# Altium PCB mcu_board.PcbDoc
Units mm, origin at the board's own origin, x right, y up, seen from the top; angles counter-clockwise.
Board outline 259.08 x 63.5 mm, 2 copper layers (Top Layer, Bottom Layer); 74 components, 57 nets, 248 pads, 15 vias.
Unrouted connection lines stored in the file: 6.
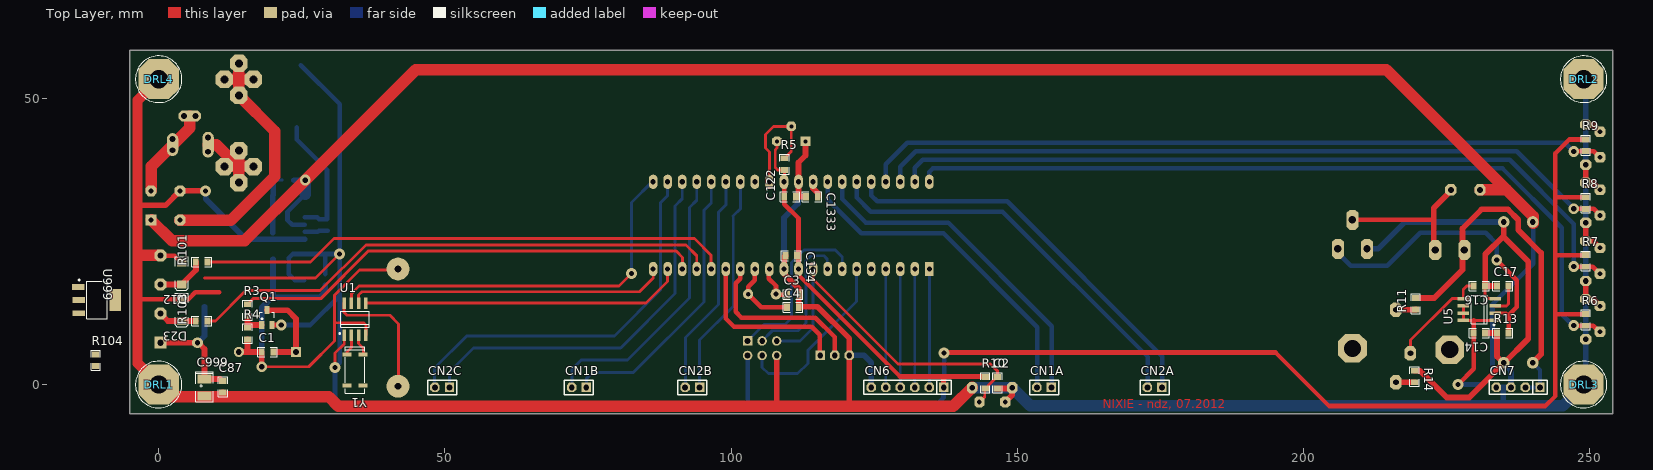
[diagram p0: Top Layer view]
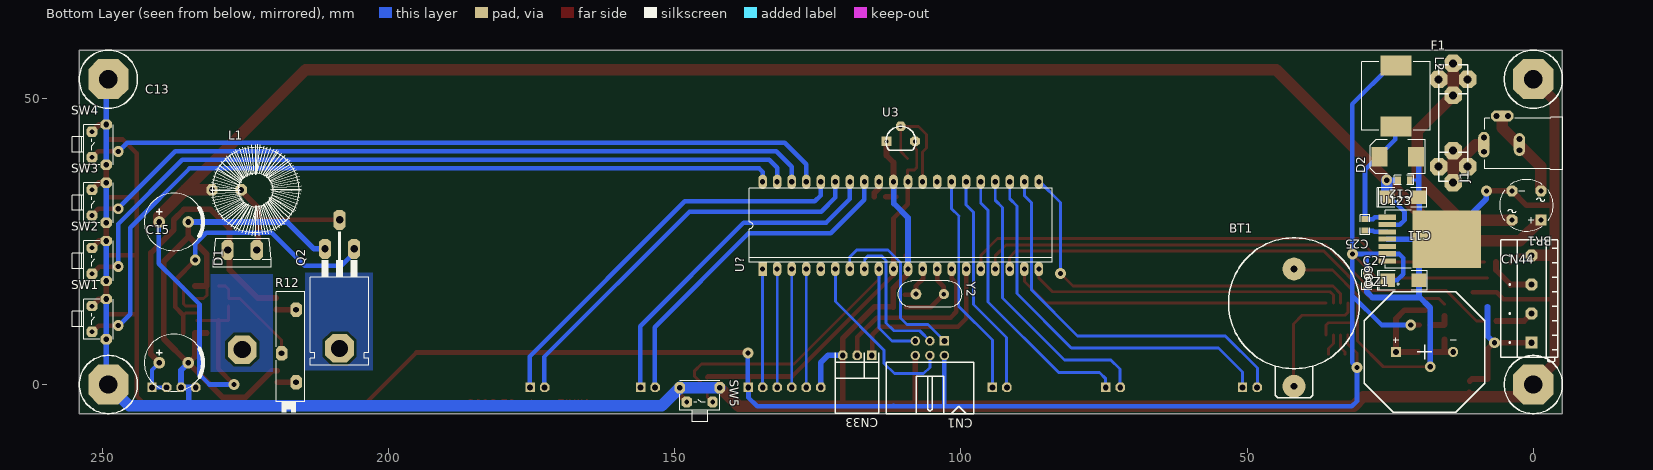
[diagram p1: Bottom Layer view, seen from below]
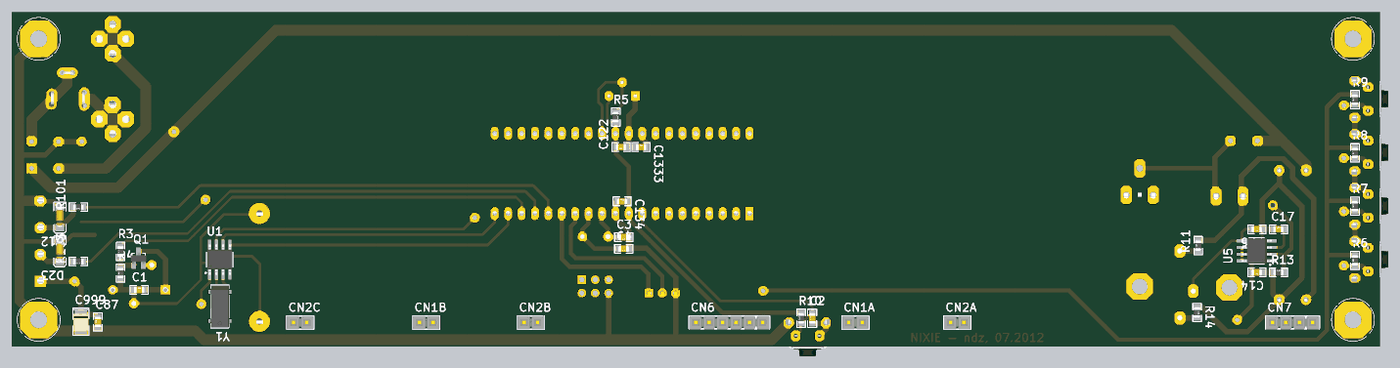
[diagram p2: 3D render of the assembled board from above, using the file's embedded part models]
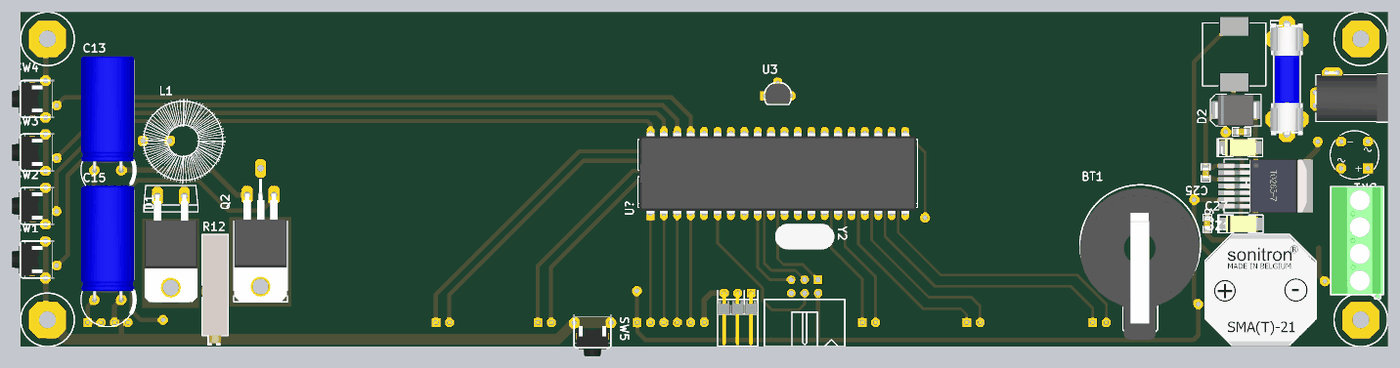
[diagram p3: 3D render of the assembled board from below, using the file's embedded part models]

## Layer stack, top to bottom
Top Solder: solder mask 0.0102, Solder Resist, Dk 3.5
Top Layer: signal copper 0.0356
Dielectric1: dielectric 0.32, FR-4, Dk 4.8
Bottom Layer: signal copper 0.0356
Bottom Solder: solder mask 0.0102, Solder Resist, Dk 3.5

## Board outline
-5.08,58.42 -5.08,-5.08 254,-5.08 254,58.42

## Design rules (kind name [scope] priority, off if disabled: settings)
Clearance [All] p1: gap=0.45 ignorepadtopadclearanceinfootprint=FALSE except(0: Arc-Hole Track-Hole SMDPad-Hole THPad-Hole Via-Hole Fill-Hole Poly-Hole Region-Hole Text-Hole)
FabricationTestPointUsage TestPointUsage [All] p1: valid=0 allowmultiple=FALSE
FabricationTestpoint Testpoint [All] p1: side=3 testpointundercomponent=TRUE minsize=1.016 maxsize=2.54 preferedsize=1.524 minholesize=0 maxholesize=1.016 preferedholesize=0.813 testpointgrid=0.025 allowsidetop=TRUE allowsidebottom=TRUE usegrid=TRUE gridtolerance=0
PolygonConnect [All] p1: connectstyle=Relief reliefconductorwidth=0.254 reliefentries=4 polygonreliefangle="90 Angle" airgapwidth=0.254
RoomDefinition mcu [InComponentClass('mcu')] p1: confinementstyle=ConfineIn formatcopy=TRUE lockcomponents=FALSE outline -11.43,-10.16 260.35,-10.16 260.35,62.23 -11.43,62.23
RoomDefinition power [InComponentClass('power')] p2: confinementstyle=ConfineIn formatcopy=TRUE lockcomponents=FALSE outline -11.43,-10.16 260.35,-10.16 260.35,62.23 -11.43,62.23
RoutingVias [All] p1: holewidth=0.9 width=1.9 viastyle="Through Hole" minholewidth=0.711 minwidth=1.27 maxholewidth=1 maxwidth=2
SilkToSolderMaskClearance SilkscreenOverComponentPads [IsPad] p1: minsilkscreentomaskgap=0.254 clearancetoexposedcopper=TRUE
SolderMaskExpansion [All] p1: expansion=0.102
Width [All] p1: maxlimit=2.54 minlimit=0.5 preferedwidth=0.762 toplayer_prefwidth=0.508 minimp=50.000000 maximp=50.000000 favimp=50.000000
27 further rules are at their usual default settings.

## Classes and differential pairs
component class mcu: BT1 BZ1 C1 C2 C3 C4 C122 C134 C1333 CN1 CN1A CN1B CN2 CN2A CN2B CN2C CN5 CN6 CN7 CN33 CN44 D12 D23 LS1 Q1 R3 R4 R5 R6 R7 R8 R9 R10 R101 R103 R104 SW1 SW2 SW3 SW4 SW5 U1 U2 U3 U? Y1 Y2
component class power: BR1 C11 C12 C13 C14 C15 C16 C17 C25 C27 C87 C99 C999 D1 D2 DRL1 DRL2 DRL3 DRL4 F1 J1 L1 L2 Q2 R11 R12 R13 R14 U5 U123 U999

## Components (designator, comment, footprint, x,y, rotation, side; value= is the part's Value field where it differs from the comment)
BR1 "W005M" WxxM 1.2,31.3 r0 bottom
BT1 "CR2032 Battery" SN2032 41.8,14.2 r90 bottom
BZ1 "SMA-21" "SMA-21 P10" 19,5.7 r180 bottom
C1 "1nF" C0805 19.016,5.7 r0 top
C2 "100nF" C0805 146.5,0.3 r90 top
C3 "22pF" C0805 110.8,15.7 r180 top
C4 "22pF" C0805 110.8,13.5 r180 top
C11 "470uF/25V" SMDC 22.8,32.7 r0 bottom
C12 "1uF / 50V" C0805 22.6,35.7 r0 bottom
C13 "1000 uF / 25V" CE10x20-5_RA 237.5,28.4 r180 bottom
C14 "100nF" C0805 230.7,9 r180 top
C15 "47uF uF / 400V" CE10x20-5_RA 237.49,3.81 r180 bottom
C16 "100nF" C0805 230.7,17.2 r180 top
C17 "1nF" C0805 234.8,17.2 r0 top
C25 "10nF" C0805 29.4,27.9 r270 bottom
C27 "1uF / 50V" C0805 29.1,18.3 r90 bottom
C87 "100nF" C0805 11.2,-0.4 r90 top
C99 "330uF/15V" SMDC 22.7,18.2 r0 bottom
C122 "1nF" C0805 110.3,32.8 r180 top
C134 "1nF" C0805 110.5,22.5 r0 top
C999 "10uF" SMDB 8,-0.5 r90 top
C1333 "1nF" C0805 114.1,32.8 r0 top
CN1 "AVR ISP Interface" IDC6_RA 102.87,7.62 r0 bottom
CN1A "CN_2x1" GP_2x1 155.956,-0.508 r180 top locked
CN1B "CN_2x1" GP_2x1 74.676,-0.508 r180 top locked
CN2A "CN_2x1" GP_2x1 175.26,-0.508 r180 top locked
CN2B "CN_2x1" GP_2x1 94.488,-0.508 r180 top locked
CN2C "CN_2x1" GP_2x1 50.8,-0.508 r180 top locked
CN6 "CN_6x1" GP_6x1 137.16,-0.508 r180 top locked
CN7 "CN_4x1" GP_4x1 241.3,-0.508 r180 top locked
CN33 "CN_3x1" GP_3x1H 115.57,5.08 r0 bottom
CN44 "MKDS 1,5/4-5,08" "MKDS 1,5/4-5,08" 0.3,12.4 r90 bottom
D1 "BYV29" TO-220-2_RA 223,23.5 r0 bottom
D2 "SK54C" SMC 23.7,39.8 r0 bottom
D12 "2V7 0,5W" MiniMELF 4,19.405 r270 top
D23 "2V7 0,5W" MiniMELF 4,13.005 r270 top
DRL1 "SCREW DRILL" "3mm screw drill I" 0,0 r0 top locked
DRL2 "SCREW DRILL" "3mm screw drill I" 248.92,53.34 r0 top locked
DRL3 "SCREW DRILL" "3mm screw drill I" 248.92,0 r0 top locked
DRL4 "SCREW DRILL" "3mm screw drill I" 0,53.34 r0 top locked
F1 "5x20 Fuse Socket" "Bezp 5x20 uniw II" 14,45.7 r90 bottom
J1 "PWR2.5" KLD-0202 -5.08,41.91 r0 bottom
L1 "330uH / 3A" IND_15_POZIOMO 223.2,34 r180 bottom
L2 "22uH" DE1207 24,50.4 r270 bottom
Q1 "BC857" SOT-23 18.9,11.7 r0 top
Q2 "IRF840" TO-220AB_RA_H1 206,23.7 r0 bottom
R3 "1k" R0805 15.5,13 r90 top
R4 "100k" R0805 15.5,8.9 r90 top
R5 "4k7" R0805 109.3,38.5 r270 top
R6 "10k" R0805 249.3,11.3 r90 top
R7 "10k" R0805 249.3,21.6 r90 top
R8 "10k" R0805 249.3,31.7 r90 top
R9 "10k" R0805 249.3,41.8 r90 top
R10 "10k" R0805 144.4,0.3 r90 top
R11 "680k" R0805 219.6,14.1 r90 top
R12 "2k2" RPOT_WIELOOB_19MM_LEZACY 217.4,6.6 r180 bottom
R13 "330" R0805 234.8,9 r0 top
R14 "4k7" R0805 219.4,1.4 r270 top
R101 "10k" R0805 7.5,21.4 r180 top
R103 "10k" R0805 7.5,11.1 r180 top
R104 "22k" R0805 -11,4.25 r90 top
SW1 "SW-TACT-SIDE" TACT_SO_THT 250.536,11.43 r0 bottom
SW2 "SW-TACT-SIDE" TACT_SO_THT 250.536,21.59 r0 bottom
SW3 "SW-TACT-SIDE" TACT_SO_THT 250.536,31.75 r0 bottom
SW4 "SW-TACT-SIDE" TACT_SO_THT 250.536,41.91 r0 bottom
SW5 "SW-TACT-SIDE" TACT_SO_THT 145.6,-1.8 r270 bottom
U1 "DS1302Z" SO8 34.29,11.43 r0 top
U3 "DS18B20+" TO-92D 110.5,42.5 r180 bottom
U5 "MC34063A" SO8 230.7,13.1 r90 top
U123 "LM2676S-3.3" "TO-263-7 (D2PAK-7)" 20.3,25.4 r270 bottom
U999 "APE1117K-HF-3" SOT-223 -14,17.05 r270 top
U? "ATmega16-16PC" DIP40 110.5,27.8 r90 bottom
Y1 "32,768kHz" 85SMX 34.29,2.54 r270 top
Y2 "16MHz" HC49-S 105.4,15.8 r180 bottom

## Footprints (in the part's own frame and the unit in brackets; to place one, negate y for a bottom-side part, rotate by r counter-clockwise, add the part's x,y. Pads: shape width x height; smd on the part's side, far side on the other; paste and mask are expansions set on the pad)
"3mm screw drill I" [mm]
  oct 7x7 hole 3.2: 0(0,0)
  silkscreen extent -4.06,-4.06 4.06,4.06
85SMX [mm] "85SMX, 5.5mm lead spacing (IQD Frequency Products)"
  rect 0.7x1.6 smd: 0(2.75,1.4) 0(2.75,-1.4) 2(-2.75,1.4)
  rect 0.7x1.6 smd paste+0: 1(-2.75,-1.4)
  silkscreen extent -4.1,-1.7 4.1,1.7, body extent -4,-1.9 4,1.9, height 2.53
"Bezp 5x20 uniw II" [mil]
  oct 120x120 hole 55.12: 1(-410,0) 1(-300,-100) 1(-300,100) 1(-190,0) 2(190,0) 2(300,-100) 2(300,100) 2(410,0)
  silkscreen extent -400,-100 400,100, body extent -420,-122 418,122, height 111
C0805 [mil]
  rect 40x50 smd: 1(-40,0) 2(40,0)
  silkscreen extent -68,-33 68,33, body extent -39,-25 39,25, height 31
CE10x20-5_RA [mil] "Aluminium Electrolytic Capacitor -  Radius: 10mm, Height: 20mm, PinSpacing: 5mm, Right Angle"
  round 80 hole 39.37: 1(-100,0) 2(100,0)
  silkscreen extent -200,-201 202,201, body extent -198,-15 198,853, height 395
DE1207 [mm] "FERROCORE DE1207 (12x12mm)"
  rect 3.5x5.4 smd: 1(5.3,0) 2(-5.3,0)
  silkscreen extent -6,-6 6,6, body extent -6,-6 6,6, height 8
DIP40 [mm]
  rect 2.5x1.5 hole 0.9: 1(-7.62,24.13)
  oval 2.5x1.5 hole 0.9: 2(-7.62,21.59) 3(-7.62,19.05) 4(-7.62,16.51) 5(-7.62,13.97) 6(-7.62,11.43) 7(-7.62,8.89) 8(-7.62,6.35) 9(-7.62,3.81) 10(-7.62,1.27) 11(-7.62,-1.27) 12(-7.62,-3.81) 13(-7.62,-6.35) 14(-7.62,-8.89) 15(-7.62,-11.43) 16(-7.62,-13.97) 17(-7.62,-16.51) 18(-7.62,-19.05) 19(-7.62,-21.59) 20(-7.62,-24.13) 21(7.62,-24.13) 22(7.62,-21.59) 23(7.62,-19.05) 24(7.62,-16.51) 25(7.62,-13.97) 26(7.62,-11.43) 27(7.62,-8.89) 28(7.62,-6.35) 29(7.62,-3.81) 30(7.62,-1.27) 31(7.62,1.27) 32(7.62,3.81) 33(7.62,6.35) 34(7.62,8.89) 35(7.62,11.43) 36(7.62,13.97) 37(7.62,16.51) 38(7.62,19.05) 39(7.62,21.59) 40(7.62,24.13)
  silkscreen extent -6.45,-26.5 6.45,26.5, body extent -7.74,-26.23 7.75,26.22, height 5.9
GP_2x1 [mil]
  rect 65x65 hole 39.37: 1(0,0)
  oct 65x65 hole 39.37: 2(100,0)
  silkscreen extent -50,-50 150,50, body extent -50,-50 150,50, height 330
GP_3x1H [mil]
  rect 65x65 hole 39.37: 1(0,0)
  oct 65x65 hole 39.37: 2(100,0) 3(200,0)
  silkscreen extent -50,-20 250,398, body extent -49,-13 251,390, height 120
GP_4x1 [mil]
  rect 65x65 hole 39.37: 1(0,0)
  oct 65x65 hole 39.37: 2(100,0) 3(200,0) 4(300,0)
  silkscreen extent -50,-50 350,47, body extent -50,-50 350,50, height 330
GP_6x1 [mil]
  rect 65x65 hole 39.37: 1(0,0)
  oct 65x65 hole 39.37: 2(100,0) 3(200,0) 4(300,0) 5(400,0) 6(500,0)
  silkscreen extent -50,-50 550,47, body extent -50,-50 550,50, height 330
HC49-S [mm] "Crystal Oscillator"
  round 1.9 hole 0.9: 1(-2.44,0)
  round 1.8 hole 0.8: 2(2.44,0)
  silkscreen extent -5.53,-2.32 5.53,2.32, body extent -5.62,-2.35 5.55,2.33, height 1.57
IDC6_RA [mil] "2.54mm, 6 Pin IDC Male Connector"
  rect 65x65 hole 39.37: 1(0,0)
  round 65 hole 39.37: 2(0,100) 3(100,0) 4(100,100) 5(200,0) 6(200,100)
  silkscreen extent -200,147 400,500
IND_15_POZIOMO [mm]
  oct 2x2 hole 1: 1(-7.62,0) 2(-2.54,0)
  silkscreen extent -8,-8.13 8,8
KLD-0202 [mm] "DC Power Jack, 2.5mm, KLD Series, PCB Mount"
  oval 2x4.5 all layers, no hole: 1(13.7,0)
  round 1.5 hole 1: 1A(13.7,-1.25) 1B(13.7,1.25) 2A(7.5,-1) 2B(7.5,1) 3A(9.5,-5) 3B(11.5,-5)
  oval 2x4 all layers, no hole: 2(7.5,0)
  oval 4x2 all layers, no hole: 3(10.5,-5)
  silkscreen extent -0.1,-4.8 13.6,4.4, body extent -0.03,-5.2 13.8,4.3, height 11
MiniMELF [mil]
  rect 55x65 smd: 1(-75,0) 2(75,0)
  silkscreen extent -115,-45 115,45, body extent -69,-28 69,28, height 55
"MKDS 1,5/4-5,08" [mm]
  rect 2.1x2.1 hole 1.1: 1(-5.08,0)
  oct 2.1x2.1 hole 1.1: 2(0,0) 3(5.08,0) 4(10.16,0)
  silkscreen extent -8.44,-4.6 12.88,5.4, body extent -8.23,-4.52 12.83,5.28, height 14.2
R0805 [mil]
  rect 40x50 smd: 1(-40,0) 2(40,0)
  silkscreen extent -68,-32 68,32, body extent -39,-25 39,25, height 31
RPOT_WIELOOB_19MM_LEZACY [mm]
  oct 2x2.54 hole 1: 1(1.27,-6.223) 2(1.27,6.477) 3(-1.27,-1.143)
  silkscreen extent -2.24,-11.51 2.77,9.6, body extent -2.16,-11.05 2.67,9.52, height 6.43
"SMA-21 P10" [mm]
  rect 1.778x1.778 hole 1: 1(-5,0)
  round 1.778 hole 1: 2(5,0)
  silkscreen extent -10.54,-10.54 10.54,10.54, body extent -10.5,-10.54 10.5,10.46, height 9.41
SMC [mm]
  rect 2.8x3.4 smd: 1(-3.175,0) 2(3.175,0)
  silkscreen extent -4.8,-3 4.8,3, body extent -3.98,-2.95 3.97,2.95, height 2.3
SMDB [mm] "SMDB"
  rect 1.6x2.4 smd: 1(1.476,0) 2(-1.475,0)
  silkscreen extent -2.46,-1.5 2.72,1.5, body extent -1.75,-1.4 1.75,1.4, height 1.91
SMDC [mm] "SMDC"
  rect 2.6x2.4 smd: 1(2.726,0) 2(-2.725,0)
  silkscreen extent -4.19,-1.7 4.44,1.7, body extent -3,-1.6 3,1.6, height 2.51
SN2032 [mm]
  round 4 hole 1.2: 1(-14.5,0) 2(6,0)
  silkscreen extent -16.54,-11.43 11.43,11.43, body extent -17.92,-11.27 10.78,11.48, height 7.05
SO8 [mm] "Small Outline; 8 Leads; Body Width 3.7 mm; Pitch 1.27 mm"
  rect 0.6x2 smd: 1(-1.905,-2.794) 2(-0.635,-2.794) 3(0.635,-2.794) 4(1.905,-2.794) 5(1.905,2.794) 6(0.635,2.794) 7(-0.635,2.794) 8(-1.905,2.794)
  silkscreen extent -2.79,-2.66 2.5,1.4, body extent -2.4,-2.9 2.4,2.9, height 1.75
SOT-23 [mm]
  rect 0.9x1.4 smd: 1(-0.9,-1.3) 2(0.9,-1.3) 3(0,1.3)
  silkscreen extent -1.25,-0.33 1.25,0.94, body extent -1.46,-1.31 1.46,1.16
SOT-223 [mm]
  rect 1x2.2 smd: 1(0,-0.027) 2(2.3,0) 3(4.6,0)
  rect 3.8x2 smd: 4(2.3,6.4)
  silkscreen extent -1.32,-0.02 5.6,5, body extent -0.96,-0.32 5.54,6.61, height 1.64
TACT_SO_THT [mm]
  oct 2x1.8 hole 0.8: 1(1.25,2.225) 2(1.25,-2.275)
  oct 2x1.8 hole 1: 3(-1.25,3.5) 4(-1.25,-3.5)
  silkscreen extent -2.44,-3.51 4.72,3.48, body extent -2.89,-4.21 5.08,4.15, height 7.37
TO-92D [mm]
  rect 1.7x1.7 hole 0.7: 1(-2.5,0)
  oct 1.7x1.7 hole 0.7: 2(0,2.6) 3(2.5,0)
  silkscreen extent -2.58,-1.61 2.62,2.6, body extent -2.77,-1.53 2.81,2.81, height 8
TO-220-2_RA [mm]
  oct 5x5 hole 3: 0(2.54,17.39)
  oct 2.1x3.5 hole 1.3: 1(0,0) 2(5.08,0)
  silkscreen extent -2.56,-2 7.64,3, body extent -2.46,-0.42 7.54,20.18, height 4.5
TO-220AB_RA_H1 [mm]
  oct 5x5 hole 3: 0(2.54,17.39)
  oct 2.1x3.5 hole 1.3: 1(0,0) 2(2.54,-5.08) 3(5.08,0)
  silkscreen extent -2.56,-3.05 7.64,20.29, body extent -2.46,-0.41 7.54,20.19, height 4.5
"TO-263-7 (D2PAK-7)" [mm]
  rect 0.91x3 smd: 1(-3.81,-5.207) 2(-2.54,-5.207) 3(-1.27,-5.207) 4(0,-5.207) 5(1.27,-5.207) 6(2.54,-5.207) 7(3.81,-5.207)
  rect 10x12 smd: 8(0,5.207)
  silkscreen extent -5.08,-5.59 5.08,-1.02, body extent -5,-5.62 5,10.05, height 4.78
WxxM [mm] "W005M - W10M, (50-1000V, 1,5A) Bridge Rectifiers, DC Components"
  rect 1.9x1.9 hole 0.9: 1(-2.54,2.54)
  oct 1.9x1.9 hole 0.9: 2(2.54,2.54) 3(-2.54,-2.54) 4(2.54,-2.54)
  silkscreen extent -4.6,-4.6 4.6,4.6, body extent -4.53,-4.58 4.54,4.5, height 5.5

## Part data
BR1: "50V, 1,5A, Single Phase Silicone Bridge Rectifier, DC Components", DatasheetVersion=E2732B, LatestRevisionDate=29-May-2009, LatestRevisionNote="Sch pins A & K swapped.", PackageDescription="Bridge Rectifier; 4 Terminals; Body 9.4 x 9.4 mm (typ); Pitch 5.08 mm", PackageReference=D-38, Published=8-Jun-2000, Publisher="Altium Limited"
BZ1: library part SMA21, "Sonitron 21mm Piezo Buzzer"
C1 C2 C3 C4 C12 C14 C16 C17 C25 C27 C87 C122 C134 C1333: library part Cap, "Capacitor", ComponentLink1Description=datasheet, ComponentLink2Description=supplier
C11 C99 C999: library part "Cap Pol Tant", "Polarized Tantalum Capacitor", ComponentLink1Description=datasheet, ComponentLink2Description=supplier
C13 C15: library part "Cap Pol", "Polarized Capacitor", ComponentLink1Description=datasheet, ComponentLink2Description=supplier
CN1: "ISP Programming Header for AVR MCU's"
D1: "Rectifier diodes ultrafast", Published=07-May-2007
D2: "Schottky Diode: 40V, 5A", PackageReference=SOT-23, Published=08-Mar-2006
D12 D23: library part BZV55C2V7, "Zener Diode 2V7, 0,5W"
DRL1 DRL2 DRL3 DRL4: "Screw Drill"
F1: library part "Fuse Socket", LatestRevisionDate=17-Jul-2002, LatestRevisionNote="Re-released for DXP Platform.", PackageDescription="Thru-Hole; 2 Leads", PackageReference=PIN-W2/E2.8, Published=8-Jun-2000, Publisher="Altium Limited"
J1: "Low Voltage Power Supply Connector", ComponentLink1Description="Manufacturer Link", ComponentLink1URL=http://domino.kycon.com/internet/Products.html, DatasheetDocument=09-May-2002, Published=17-Dec-2003, Publisher="Altium Limited"
L1: library part InducCore, "Magnetic-Core Inductor with Winding Polarity Marking", Published=08-Mar-2006
L2: library part Ind, "Inductor", ComponentLink1Description=datasheet, ComponentLink2Description=supplier, Published=08-Mar-2006
Q1: "PNP General Purpose Transistor (VCE=-45V, IC=-100mA)"
Q2: "N-Channel Power MOSFET", Package Reference=TO-220, Published=22-Jan-2007
R3 R4 R5 R6 R7 R8 R9 R10 R11 R13 R14 R101 R103 R104: library part Res, "Resistor", ComponentLink1Description=datasheet, ComponentLink2Description=supplier, Published=19-Feb-2006
R12: library part RPot, "Potentiometer", Published=03-Apr-2006
SW1 SW2 SW3 SW4 SW5: "Side-operated Tactile Switch", Published=30-Jun-2006
U1: "Trickle-Charge Timekeeping Chip"
U3: "DS18B20+ (TO92) 1-Wire Digital Thermometer"
U5: "1.5 A, Step-Up/Down/Inverting Switching Regulator", PackageReference=SO8, Published=22-Nov-2006
U123: "High Efficiency 3A Step-Down Simple Switcher 3.3V Regulator in TO-263 (D2PAK)"
U999: "800mA Low-Dropout Adjustable, 1A Linear Regulator, SOT223 Package", ComponentLink1Description="Manufacturer Link", ComponentLink1URL=http://www.st.com/, ComponentLink2Description=Datasheet, ComponentLink2URL=http://www.st.com/stonline/books/pdf/docs/2574.pdf, DatasheetVersion=Feb-2004, LatestRevisionDate=06-Jun-2005, LatestRevisionNote="PCB Pin sequence re-ordered.", PackageDescription="TO, Thru-Hole, Vertical, Heatsink Mounted; 3 In-Line Leads; Pitch 2.54 mm", PackageReference=TO-220A, PackageVersion=Jul-2004, Published=24-Aug-2001, Publisher="Altium Limited", Supplier 1=TME, Supplier Part Number 1=APE1117K-HF-3
U?: "8-Bit AVR Microcontroller with 16K Bytes of In-System Programmable Flash Memory", Package Information="Latest Revision: Dec-1999", Package Reference=40P6, Datasheet="Latest Revision: 2466E-AVR-10/02", Published=17-Sep-2003, Publisher="Altium Limited"
Y1: library part "Clock XTAL", "Crystal Clock Oscillator", ComponentLink1Description=datasheet, ComponentLink2Description=supplier
Y2: library part XTAL, "Crystal Oscillator", ComponentLink1Description=datasheet, ComponentLink2Description=supplier
BT1: Published=24-Mar-1999, Publisher="Altium Limited", Revision="July-2002: Re-released for DXP Platform."

## Via types
v1: diameter 1.9, hole 0.9, Top Layer to Bottom Layer, 15 vias

## Nets (pads, with @x,y where several pads share a name; then routed paths per layer and width w, separated by ;. In a path a pad name is that pad's centre, name@x,y a point inside that pad or via, vN(x,y) a via of type N, cw(c..) or ccw(c..) an arc to the next point about the centre after c; other vN are vias at no path point)
1WIRE: R5.1 U3.2 U?.29 | length 20.2
  Top Layer w0.5: U?.29@106.7,35.4 106.7,40.6 106,41.3 106,43.7 107.4,45.1 U3.2@110.6,45.1 ; R5.1 110.5,40.716 U3.2@110.5,45.4
ANODE_H1: CN2C.1 U?.23 | length 67.7
  Bottom Layer w0.5: CN2C.1@50.8,-0.4 50.8,2.2 55,6.4 80.7,6.4 90.196,15.896 90.196,31.196 91.45,32.45 U?.23
ANODE_H10: CN2C.2 U?.22 | length 67.9
  Bottom Layer w0.5: CN2C.2@48.2,-0.5 48.2,2.9 53.8,8.5 79.6,8.5 87.656,16.556 87.656,31.756 88.91,33.01 U?.22
  Bottom Layer w1: CN2C.2 CN2C.2@48.26,-0.5
ANODE_M1: CN2B.1 U?.27 | length 39
  Bottom Layer w0.5: CN2B.1@94.5,-0.6 94.5,7.8 100.356,13.656 100.356,29.444 100.35,29.45 101.61,30.71 U?.27
ANODE_M10: CN2B.2 U?.26 | length 38.8
  Bottom Layer w0.5: CN2B.2@92,-0.5 92,8.2 97.8,14 97.8,30.1 99.07,31.37 U?.26
ANODE_S1: CN2A.1 U?.36 | length 70.3
  Bottom Layer w0.8: U?.36 124.47,33.03 125.5,32 148.2,32 175.3,4.9 CN2A.1@175.3,-0.5
ANODE_S10: CN2A.2 U?.35 | length 70.4
  Bottom Layer w0.762: U?.35 121.93,32.67 124.4,30.2 147.4,30.2 172.8,4.8 CN2A.2@172.8,-0.4
BUZZER: R3.2 U?.18 | length 82.3
  Top Layer w0.5: R3.2 16.484,15 28.3,15 36.6,23.3 90.4,23.3 91.5,22.2 U?.18@91.5,20.2
DIG_A: CN6.2 U?.1 | length 20.5
  Bottom Layer w0.5: CN6.2@134.63,-0.37 U?.1
DIG_B: CN6.3 U?.2 | length 20.7
  Bottom Layer w0.5: CN6.3 U?.2@132.08,20.18
DIG_C: CN6.4 U?.3 | length 20.6
  Bottom Layer w0.5: CN6.4@129.55,-0.45 U?.3
DIG_D: CN6.5 U?.4 | length 20.7
  Bottom Layer w0.5: CN6.5 U?.4@127,20.2
GND: BR1.4 BT1.2 BZ1.2 C1.1 C2.1 C3.1 C4.1 C11.2 C12.1 C13.2 C14.1 C15.2 C16.1 C17.1 C27.1 C87.1 C99.2 C122.1 C134.1 C999.2 C1333.1 CN1.6 CN6.6 CN7.3 CN7.4 CN33.3 CN44.4 D2.1 D12.1 D23.1 DRL1.0 DRL2.0 DRL3.0 DRL4.0 Q2.3 R4.1 R13.1 R14.1 SW1.2 SW1.3 SW1.4 SW2.2 SW2.3 SW2.4 SW3.2 SW3.3 SW3.4 SW4.2 SW4.3 SW4.4 SW5.2 SW5.3 SW5.4 U1.4 U3.1 U5.4 U123.4 U123.8 U999.1 U?.11 U?.31 | length 726.7
  Top Layer w0.5: v1(18,3.1) 26.2,3.1 30.7,7.6 30.7,15.6 35.1,20 BT1.2@41.9,20 ; 30.8,10.8 35.8,10.8 36.195,10.405 U1.4 ; C16.1@231.7,17.3 231.7,15.6 232.295,15.005 U5.4
  Top Layer w0.8: -3.8,14.9 -3.7,14.9 5.2,14.9 6.4,16.1 10.6,16.1 ; CN44.4@0.2,22.5 2.81,22.5 D12.1
  Top Layer w1: -3.7,31.3 1.2,31.3 BR1.4 v1(8.16,33.84) ; C999.2 10.625,-1.975 C87.1@11.2,-1.4 ; BZ1.2 15.4,5.7 ; R4.1 15.5,5.8 15.4,5.7 ; C1.1@17.9,5.7 15.4,5.7 ; v1(18,3.1) C1.1 ; 107.95,-3.55 CN1.6 ; U?.11 109.23,19.37 111.8,16.8 C4.1@111.8,13.5 ; U?.11@109.3,20.2 109.3,22.316 C134.1 ; C122.1@111.4,32.8 C1333.1 ; C122.1@111.77,32.93 U?.31 ; U?.31@111.77,35.43 111.77,38.77 113,40 U3.1 ; C4.1@111.9,13.6 115.1,13.6 120.65,8.05 CN33.3 120.65,-3.75 ; C2.1@146.4,-0.7 148.95,-0.7 SW5.4 149.1,-1.825 SW5.2 ; R14.1 220.334,2.416 225,-2.25 228.95,-2.25 C15.2@234.95,3.75 ; C14.1 R13.1 233.8,9 233.8,4.9 C15.2@234.95,3.75 ; C16.1 231.75,17.234 231.75,22.75 234.96,25.96 C13.2@234.96,28.36 ; C16.1@231.916,17.2 C17.1 C17.1@233.8,17.2 ; 234.96,25.79 239.25,21.5 239.25,8 C15.2@235,3.75 ; C13.2 C13.2@234.96,28.36 ; C15.2@235,3.8 C15.2@234.95,3.75 ; C13.2@235,28.4 C13.2@234.96,28.36 ; SW2.4 SW3.3 249.286,28.286 SW3.3@249.3,28.3 ; SW3.4 249.286,38.386 SW4.3@249.3,38.4 ; SW2.3@249.3,18 249.3,14.9 250.591,14.9 SW1.2 ; SW2.4@249.3,25.1 250.551,25.1 SW2.2 ; SW3.4@249.3,35.2 250.611,35.2 SW3.2 ; SW4.4@249.3,45.4 250.571,45.4 SW4.2
  Top Layer w1.8: DRL1.0 -3.7,3.7 -3.7,14.9 -3.7,31.3 -3.7,49.64 DRL4.0
  Top Layer w2: -3.6,22.6 CN44.4@0.3,22.6 ; DRL1.0 2.1,-2.1 29.7,-2.1 31.384,-3.784 138.816,-3.784 SW5.3@142.1,-0.5
  Bottom Layer w0.5: 20,35.8 20.1,35.7 C12.1
  Bottom Layer w1: v1@8.2,33.8 8.2,32.4 15.2,25.4 U123.4 U123.4@25.527,25.4 ; v1(18,3.1) 18,13.4 19.975,15.375 C99.2 19.975,21.875 U123.8@20,21.9 ; 19.9,15.2 28.1,15.2 29.1,16.2 C27.1 C27.1@29.1,17.3 ; U123.8@19.9,26.5 19.9,33.025 C11.2@20,33.125 ; C11.2@20,33.1 C11.2@20,33.125 ; D2.1 20,39.275 20,35.8 C11.2@20,33.125 ; U?.11 109.23,29.13 111.7,31.6 U?.31@111.7,35.5 ; CN33.3@120.6,5.1 123.2,5.1 124.46,3.84 CN6.6 ; Q2.3 213,23.7 217.7,28.4 C13.2 C13.2@235,28.4 ; CN7.4 234.9,-0.508 ; C15.2 236.25,2.51 CN7.3@236.25,-0.5 ; 235,-3.7 234.9,-3.6 234.9,-0.508 ; CN7.3@236.2,-0.5 236.192,-0.508 234.9,-0.508 ; DRL2.0@248.7,53.3 249.286,52.714 SW4.4 249.286,38.414 SW4.3@249.3,38.4 ; SW2.3@249.2,18.1 249.286,18.186 SW2.4 ; DRL3.0@249.286,0.486 SW1.3 ; SW1.4 249.286,8.014 SW1.3@249.3,8 ; SW3.4 249.286,28.314 SW3.3@249.3,28.3
  Bottom Layer w2: SW5.3 149.05,-0.55 SW5.4@149.1,-0.5 ; SW5.4 152.25,-3.7 235,-3.7 245.3,-3.7 DRL3.0@249,0
MISO: CN1.1 U?.7 | length 31.4
  Bottom Layer w0.5: CN1.1 105.75,10.5 109.4,10.5 110.516,11.616 110.516,21.316 112.7,23.5 118.2,23.5 119.4,22.3 119.4,20.3 U?.7@119.3,20.2
MOSI: CN1.4 U?.6 | length 31.3
  Bottom Layer w0.5: CN1.4 105.41,2.99 106.5,1.9 111.6,1.9 113.4,3.7 113.4,6 121.9,14.5 U?.6@121.9,20.2
NEON1A: CN1A.1 U?.34 | length 59.6
  Bottom Layer w0.8: U?.34 119.39,32.41 123.5,28.3 137.9,28.3 156,10.2 CN1A.1@156,-0.6
NEON1B: CN1B.1 U?.25 | length 49.1
  Bottom Layer w0.5: CN1B.1@74.7,-0.5 74.7,1 75.8,2.1 82.9,2.1 95.244,14.444 95.244,30.444 96.53,31.73 U?.25
  Bottom Layer w1: CN1B.1 CN1B.1@74.676,-0.5
NEON2A: CN1A.2 U?.33 | length 59.4
  Bottom Layer w0.8: U?.33 116.85,32.25 122.7,26.4 137.1,26.4 153.5,10 CN1A.2@153.5,-0.4
NEON2B: CN1B.2 U?.24 | length 49.7
  Bottom Layer w0.5: CN1B.2@72.2,-0.5 72.2,2.7 73.8,4.3 81.9,4.3 92.736,15.136 92.736,30.936 93.99,32.19 U?.24
  Bottom Layer w1: CN1B.2 CN1B.2@72.136,-0.5
NetBR1_2: BR1.2 F1.2 | length 47.2
  Top Layer w2: BR1.2@3.7,28.7 12.612,28.7 20.3,36.388 20.3,44.216 F1.2@13.97,50.546 ; F1.2@11.46,53.32 14,53.32 ; F1.2@14,50.526 14,53.32 ; F1.2@14,56.114 14,53.32 ; F1.2@16.52,53.32 14,53.32
NetBR1_3: BR1.3 J1.2 J1.2A J1.2B J1.3 J1.3A J1.3B | length 15.8
  Top Layer w2: BR1.3@-1.3,33.9 -1.3,38.1 5.42,44.82 J1.3
NetBT1_1: BT1.1 U1.8 | length 23.1
  Top Layer w0.508: U1.8 32.385,12.615 32.9,12.1 40.4,12.1 41.9,10.6 BT1.1@41.9,-0.5
NetBZ1_1: BZ1.1 C1.2 Q1.3 | length 15.4
  Top Layer w1: Q1.3 22.5,13 24,11.5 BZ1.1 C1.2@20.1,5.7
NetC3_2: C3.2 U?.12 Y2.1 | length 6.9
  Top Layer w0.8: U?.12@106.6,20.2 106.6,18.5 107.84,17.26 Y2.1 ; Y2.1@107.9,15.9 108.1,15.7 C3.2
NetC4_2: C4.2 U?.13 Y2.2 | length 12.6
  Top Layer w0.8: U?.13@104.1,20.3 104.1,18.2 102.96,17.06 Y2.2 105.26,13.5 C4.2@109.6,13.5
NetC16_2: C16.2 R12.3 U5.5 | length 18.2
  Top Layer w0.5: R12.3 218.67,7.77 225.9,15 227.9,15 227.9,16.6 228.5,17.2 C16.2
NetC17_2: C17.2 U5.3 | length 5.5
  Top Layer w0.5: U5.3 235.435,13.735 235.816,14.116 C17.2@235.816,17.1
NetC25_1: C25.1 D2.2 L2.1 U123.1 | length 22.2
  Bottom Layer w0.8: L2.1@24.1,44.9 24.1,42.8 29.4,37.5 C25.1 ; U123.1@25.527,29.21 27.69,29.21 28,28.9 C25.1@29.4,28.9
NetC25_2: C25.2 U123.3 | length 4.1
  Bottom Layer w0.8: U123.3@25.527,26.67 27.77,26.67 28,26.9 C25.2@29.5,26.9
NetC1333_2: C1333.2 U?.32 | length 2.9
  Top Layer w1: U?.32@114.3,35.4 114.3,34.3 115.116,33.484 C1333.2
NetCN44_2: CN44.2 D23.2 R103.2 | length 6.7
  Top Layer w1: CN44.2 1.6,11.1 D23.2 R103.2
NetCN44_3: CN44.3 D12.2 R101.2 R104.2 | length 8.7
  Top Layer w1: CN44.3 3.92,17.48 D12.2@4,17.4 ; D12.2 6.5,20 R101.2@6.5,21.4
NetD1_1: D1.1 L1.2 Q2.2 | length 26.2
  Top Layer w0.8: Q2.2 222.72,28.78
  Top Layer w1: D1.1@223.06,23.4 222.75,23.71 222.75,28.45 222.75,30.85 L1.2@225.9,34
NetF1_1: F1.1 J1.1 J1.1A J1.1B | length 17.6
  Top Layer w2: J1.1 10.09,41.91 13.9,38.1 ; F1.1@11.43,38.1 13.9,38.1 ; F1.1@13.97,40.894 13.97,38.1 ; F1.1@14,35.3 13.97,35.33 13.97,38.03 ; 14,38 13.97,38.03 ; F1.1@16.4,38.1 13.97,38.1 ; 13.9,38.1 13.97,38.03 ; 13.9,38.1 13.97,38.1 ; 13.97,38.03 13.97,38.1
NetQ1_1: Q1.1 R3.1 R4.2 | length 4
  Top Layer w1: R3.1 15.5,10.5 15.6,10.4 Q1.1
NetQ2_1: Q2.1 R13.2 U5.2 | length 52.7
  Top Layer w0.5: U5.2@233.5,12.5 235.4,12.5 235.816,12.084
  Top Layer w0.8: v1(233.75,21.75) 237.25,18.25 237.25,13.55 235.816,12.116 235.816,12.084 R13.2
  Bottom Layer w0.8: Q2.1 206,23 208.25,20.75 214.65,20.75 220.4,26.5 231.8,26.5 233.75,24.55 v1(233.75,21.75)
NetR11_1: R11.1 R12.2 | length 3.5
  Top Layer w1: R12.2 219.577,13.077 R11.1@219.6,13.1
NetR12_1: R12.1 R14.2 | length 3.3
  Top Layer w1: R12.1 219.377,0.377 R14.2@219.4,0.4
NetU1_2: U1.2 Y1.1 | length 3.6
  Top Layer w0.5: Y1.1@32.9,5.3 32.9,5.7 33.655,6.455 U1.2
NetU1_3: U1.3 Y1.2 | length 3.7
  Top Layer w0.5: U1.3 34.925,7.175 35.8,6.3 Y1.2@35.8,5.3
RESET: C2.2 CN1.5 R10.1 SW5.1 U?.9 | length 65
  Top Layer w0.5: U?.9@114.3,20.2 114.3,18.45 129.15,3.6 145.3,3.6 146.5,2.4 146.5,1.384 R10.1 ; SW5.1 144.3,-2.125 R10.1@144.3,-0.6
  Bottom Layer w0.5: CN1.5 112.02,7.62 114.3,9.9 U?.9@114.3,20.2
RTC_CE: U1.5 U?.19 | length 56.5
  Top Layer w0.5: U1.5 85.124,14.224 88.9,18 U?.19@88.9,20.2
RTC_I/O: U1.6 U?.20 | length 55.6
  Top Layer w0.5: U1.6 34.925,15.625 35.5,16.2 84,16.2 86.4,18.6 U?.20@86.4,20.1
RTC_SCK: U1.7 U?.21 | length 69.7
  Top Layer w0.5: U1.7 33.655,15.855 35,17.2 80.4,17.2 v1(82.6,19.4)
  Bottom Layer w0.5: v1(82.6,19.4) 82.6,31.8 U?.21@86.3,35.5
RXD: CN33.2 U?.14 | length 30.1
  Top Layer w0.8: U?.14 101.61,18.51 100.8,17.7 100.8,12.7 101.8,11.7 114.7,11.7 118.1,8.3 CN33.2@118.1,5.1
SCK: CN1.3 U?.8 | length 25.9
  Bottom Layer w0.5: CN1.3 107.19,9.4 111.7,9.4 113.056,10.756 113.056,21.656 113.9,22.5 116.2,22.5 116.8,21.9 U?.8@116.8,20.2
SUART_RX: R101.1 U?.16 | length 93.3
  Top Layer w0.5: R101.1 26.5,21.4 30.6,25.5 93.6,25.5 96.5,22.6 U?.16@96.5,20.2
SUART_TX: R103.1 U?.17 | length 94
  Top Layer w0.5: R103.1 9.9,11.1 15.2,16.4 28.2,16.4 36.2,24.4 92.1,24.4 94,22.5 U?.17@94,20.3
SW1: R6.1 SW1.1 U?.40 | length 139.6
  Top Layer w0.8: v1@247.216,10.284 R6.1 250.616,10.284 SW1.1@251.7,9.2
  Bottom Layer w0.8: U?.40 134.63,37.13 135.25,37.75 234.75,37.75 245.1,27.4 245.1,12.3 v1@247.1,10.3
  other v1: 247.2,10.3
SW2: R7.1 SW2.1 U?.39 | length 135.3
  Top Layer w0.8: v1@247.1,20.6 247.116,20.584 R7.1 250.516,20.584 SW2.1@251.7,19.4
  Bottom Layer w0.8: U?.39 132.09,37.84 133.5,39.25 236,39.25 247.2,28.05 v1(247.2,20.6)
SW3: R8.1 SW3.1 U?.38 | length 130.6
  Top Layer w0.8: v1(247.2,30.7) 247.216,30.684 R8.1 250.716,30.684 SW3.1@251.7,29.7
  Bottom Layer w0.8: U?.38 129.55,38.05 132.25,40.75 237.25,40.75 v1@247.3,30.7
SW4: R9.1 SW4.1 U?.37 | length 130.5
  Top Layer w0.8: v1@247.1,40.8 247.116,40.784 R9.1 250.716,40.784 SW4.1@251.7,39.8
  Bottom Layer w0.8: U?.37 127.01,38.51 130.75,42.25 245.65,42.25 v1(247.2,40.7)
TXD: CN33.1 U?.15 | length 29.9
  Top Layer w0.8: U?.15 99.07,11.53 100.5,10.1 114.1,10.1 115.5,8.7 CN33.1@115.5,5.1
VCC_3V0: C87.2 C999.1 CN44.1 R104.1 U999.2 U999.4 | length 23.4
  Top Layer w1: CN44.1 v1(6.8,7.3) 6.9,7.3 8,6.2 C999.1@8,1 ; C999.1 10.724,0.976 C87.2@11.1,0.6
  Bottom Layer w1: v1(6.8,7.3) 8,8.5 8,13.6
VCC_5V: C27.2 C99.1 C122.2 C134.2 CN1.2 CN6.1 L2.2 Q1.2 R5.2 R6.2 R7.2 R8.2 R9.2 R10.2 U1.1 U3.3 U123.6 U999.3 U?.10 U?.30 | length 493.5
  Top Layer w0.5: 8,18.6 27.4,18.6 v1(31.6,22.8) ; v1(30.8,3) 30.8,5.5 32.4,7.1 U1.1@32.4,8.7 ; U3.3 108,41.3 107.7,41 107.7,37.9 108.1,37.5 109.3,37.5 R5.2 U?.30@109.3,35.5
  Top Layer w0.8: Q1.2 v1(21.4,10.4) ; U?.30@109.3,35.4 109.3,31.5 111.77,29.03 U?.10 111.77,19.13 129.5,1.4 137.1,1.4 ; CN6.1@137.1,-0.4 137.1,1.4 ; v1(137.2,5.5) 137.3,5.6 195.1,5.6 204.45,-3.75 242.25,-3.75 244,-2 244,12.3 ; R10.2@144.3,1.3 144.2,1.4 137.1,1.4 ; 244.016,22.616 R7.2 ; 244.084,32.716 R8.2 ; R9.2@249.2,42.8 246.4,42.8 244,40.4 244,12.3 ; R9.2@249.2,42.816 R9.2 ; R6.2@249.3,12.3 244,12.3
  Bottom Layer w0.8: v1(21.4,10.4) 26.5,10.4 31.6,15.5 ; L2.2@24.8,55.8 31.6,49 v1(31.6,22.8) ; C99.1 23.8,18.2 22.7,19.3 22.7,22.1 23.4,22.8 29.1,22.8 ; C27.2 29.1,22.8 ; 102.8,-3.8 111.7,-3.8 ; CN1.2 102.87,-3.63 102.7,-3.8 31.7,-3.8 30.8,-2.9 v1(30.8,3) 31.6,3.8 31.6,15.5 ; 111.77,-3.73 111.7,-3.8 ; CN6.1@137.1,-0.5 137.1,-2.3 135.6,-3.8 111.7,-3.8 ; CN6.1@137.2,-0.4 v1(137.2,5.5) ; 29.1,22.8 v1(31.6,22.8) ; 31.6,15.5 v1(31.6,22.8)
VCC_12V: BR1.1 C11.1 C12.2 C13.1 C14.2 L1.1 U5.1 U5.6 U5.7 U5.8 U123.2 | length 342.1
  Top Layer w0.5: U5.6 U5.7 U5.8 229.75,11.195 U5.1
  Top Layer w0.8: v1(227,0) 229.75,2.75 229.75,11.195 229.75,11.25
  Top Layer w2: BR1.1 2.32,25.1 15,25.1 v1(25.6,35.7) 44.9,55 214.481,55 235.481,34 ; L1.1 235.481,34 ; 235.5,34 235.481,34 ; C13.1@240.1,28.2 240.1,29.381 235.481,34
  Bottom Layer w0.8: U123.2@25.5,27.9 23.3,27.9 22.5,28.7 22.5,30.174 C11.1@25.526,33.2 ; v1(227,0) 231.25,0 233,1.75 233,14 236.75,17.75 240.1,21.1 C13.1@240.1,28.4
  Bottom Layer w1: C12.2 v1@25.5,35.7
  Bottom Layer w2: C11.1@25.6,33.2 v1(25.6,35.7)
VCC_170V: C15.1 CN7.1 CN7.2 D1.2 R11.2 | length 63.9
  Top Layer w1: R11.2 222.816,15.116 227.75,20.05 227.75,27.25 231.1,30.6 235.7,30.6 237.5,28.8 237.5,27 241.5,23 241.5,5.3 C15.1@240,3.8
  Bottom Layer w0.762: CN7.2 241.292,-0.508 241.3,-0.5 241.3,2.54 C15.1
pads on no net: D1.0 Q2.0 U123.5 U123.7 U?.5 U?.28 Y1.0

## Polygon pours and split planes (outlines as drawn)
no net on Bottom Layer "Top Layer-No Net" (solid, pour order 4): 202.75,19.5 214.5,19.5 214.5,2.5 202.75,2.5
no net on Bottom Layer "Top Layer-No Net" (solid, pour order 3): 220.25,19.25 231,19.25 231,2.25 220.25,2.25

## Other copper
Top Layer:
  text "NIXIE - ndz, 07.2012" at 164.9,-4.1 h1.52

## Silkscreen, mask and mechanical layers (free items; w line width, h text height)
Mechanical 3:
  the board outline again, w0.3

## Text inside footprints (layer, text, board x,y; h text height)
J1: Mechanical 1 "Alert PCB fab to slot details" at -4.794,35.844 h0.3 r180; Mechanical 1 "Assign keep-out area to slot" at -4.794,35.344 h0.3 r180; Mechanical 1 "Mech 1 - Slot cut-out" at -4.794,36.344 h0.3 r180; Mechanical 1 "Mech 2 - Clearance, move to internal plane if present" at -4.794,36.844 h0.3 r180